# Altium PCB PCB2.PcbDoc
Units mm, origin at the board's own origin, x right, y up, seen from the top; angles counter-clockwise.
Board outline 101.75 x 39.87 mm, 2 copper layers (Top Layer, Bottom Layer); 16 components, 6 nets, 33 pads, 32 vias.
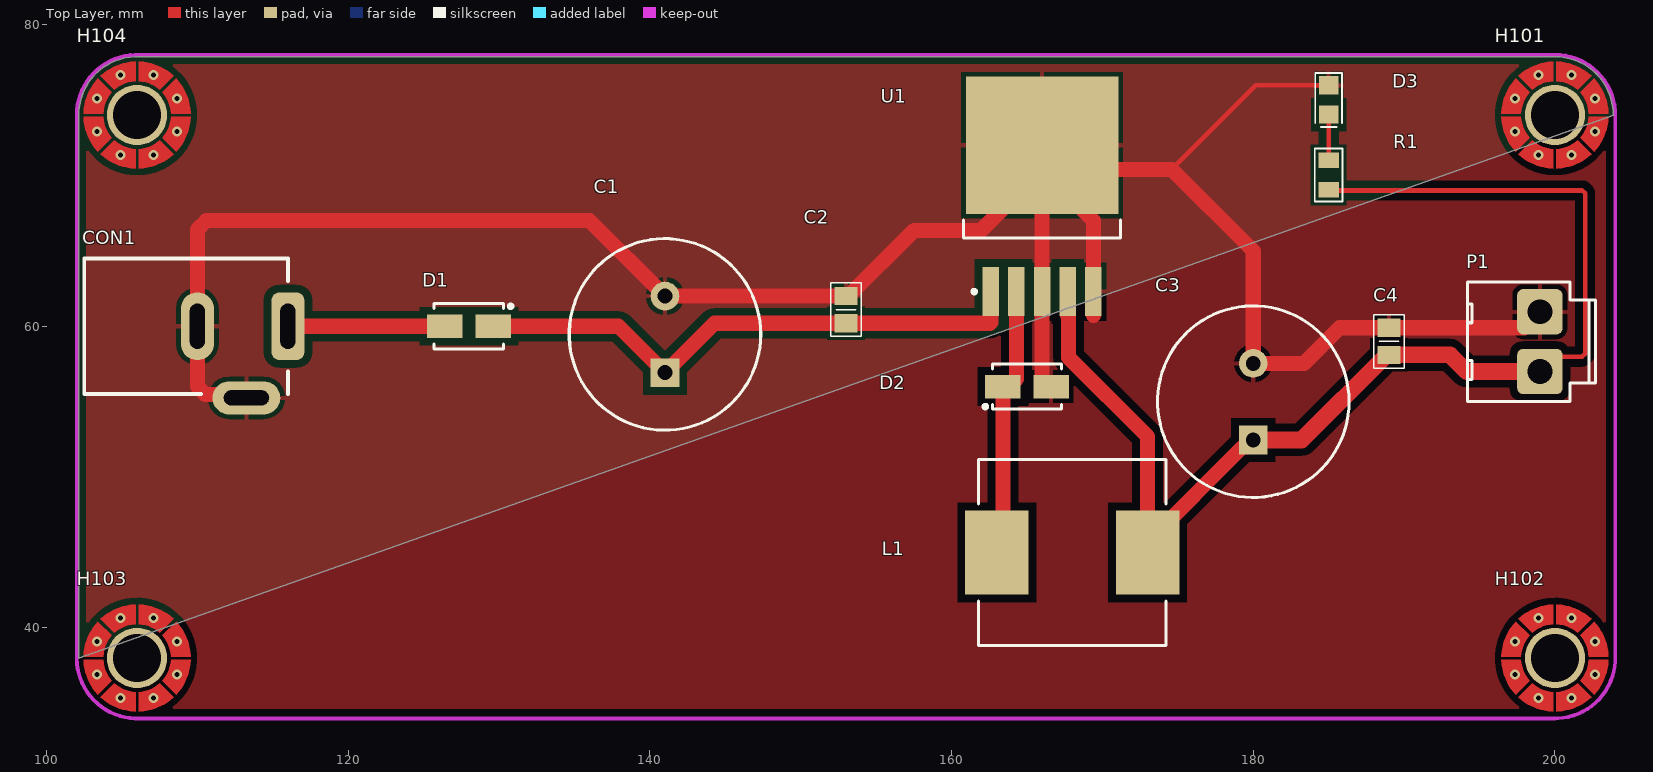
[diagram p0: Top Layer view]
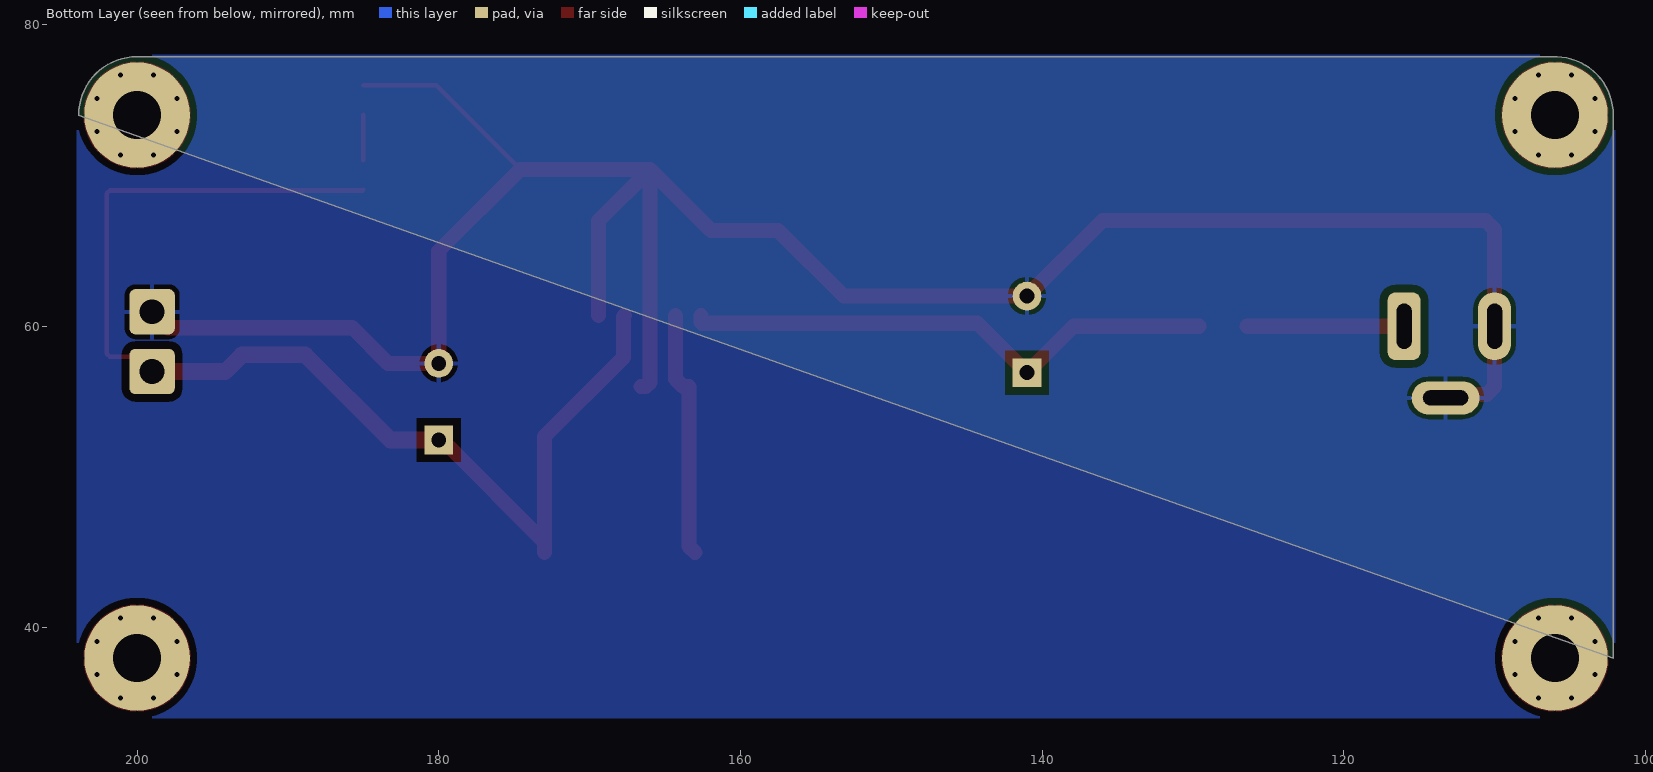
[diagram p1: Bottom Layer view, seen from below]

## Layer stack, top to bottom
Top Solder: solder mask 0.0102, Solder Resist, Dk 3.5
Top Layer: signal copper 0.0356
Dielectric 1: dielectric 0.32, FR-4, Dk 4.8
Bottom Layer: signal copper 0.0356
Bottom Solder: solder mask 0.0102, Solder Resist, Dk 3.5

## Board outline
102.127,38 102.127,74 cw(c106,74) 105.873,77.871 106,77.873 200,77.873 cw(c200,74) 203.873,74

## Design rules (kind name [scope] priority, off if disabled: settings)
Clearance Clearance_3 [InComponent('H*')] p1: gap=0 ignorepadtopadclearanceinfootprint=FALSE
Clearance Clearance_2 [InNet('ACL*') OR InNet('ACN*')] p2: gap=0.35 ignorepadtopadclearanceinfootprint=FALSE except(0: Arc-Hole Track-Hole SMDPad-Hole THPad-Hole Via-Hole Fill-Hole Poly-Hole Region-Hole Text-Hole)
Clearance Clearance_1 [InPolygon] p3: gap=0.5 ignorepadtopadclearanceinfootprint=FALSE except(0: Arc-Hole Track-Hole SMDPad-Hole THPad-Hole Via-Hole Fill-Hole Poly-Hole Region-Hole Text-Hole)
Clearance [All] p4: gap=0.3 ignorepadtopadclearanceinfootprint=FALSE except(0: Arc-Hole Track-Hole SMDPad-Hole THPad-Hole Via-Hole Fill-Hole Poly-Hole Region-Hole Text-Hole)
ComponentClearance ComponentClearance_1 [InComponent('M802') OR  InComponent('P104') OR InComponent('Y202') OR InComponent('C101') OR InComponent('P101') OR InComponent('L101') OR  InComponent('S309') OR InComponent('S310') OR InComponent('H*')] p1: gap=0 collisioncheckmode=3 verticalgap=0 showdistances=FALSE
ComponentClearance [All] p2: gap=0.254 collisioncheckmode=3 verticalgap=0.254 showdistances=FALSE
Height [All] p1: minheight=0 maxheight=30 prefheight=12.7
PolygonConnect PolygonConnect_1 [IsVia] p1: connectstyle=Direct reliefconductorwidth=0.254 reliefentries=4 polygonreliefangle="90 Angle" airgapwidth=0.254
PolygonConnect PolygonConnect_2 [InNet('GND')] p2: connectstyle=Relief reliefconductorwidth=0.3 reliefentries=4 polygonreliefangle="90 Angle" airgapwidth=0.3
PolygonConnect [All] p3: connectstyle=Relief reliefconductorwidth=0.381 reliefentries=4 polygonreliefangle="90 Angle" airgapwidth=0.635
RoutingVias [All] p1: holewidth=0.4 width=0.8 viastyle="Through Hole" minholewidth=0.3 minwidth=0.6 maxholewidth=2 maxwidth=5
SolderMaskExpansion [All] p1: expansion=0.102 istentingtop=FALSE
Width [All] p1: maxlimit=50 minlimit=0.2 preferedwidth=0.3
28 further rules are at their usual default settings.

## Components (designator, comment, footprint, x,y, rotation, side; value= is the part's Value field where it differs from the comment)
C1 "680uF" CYL/D.500/LS.200 141,59.46 r90 top
C2 "0.1uF" "C 0805" 153,61.1 r90 top
C3 "220uF" CYL/D.500/LS.200 180,55 r90 top
C4 "0.1uF" "C 0805" 189,59 r90 top
CON1 "CON DC PWR" CONN/DC/PWR/5.0MM 116,60 r0 top
D1 "SS34" "DO-214AC (SMA)" 128,60 r0 top
D2 "IN5824" "DO-214AC (SMA)" 165,56 r180 top
D3 "Led" "Led 0805 RED" 185,75 r90 top
H101 "Screw Hole" SCREW/3.2/7.0/M 200,74 r0 top
H102 "Screw Hole" SCREW/3.2/7.0/M 200,38 r0 top
H103 "Screw Hole" SCREW/3.2/7.0/M 106,38 r0 top
H104 "Screw Hole" SCREW/3.2/7.0/M 106,74 r0 top
L1 "33uH" "Inductor SMD 12x12x8" 168,45 r0 top
P1 "Header 2" HDR/Header/2/VH 199,58.98 r90 top
R1 "1k" "R 0805" 185,70.025 r270 top
U1 "LM2596S-5.0" TO-263-5 166,68.6 r90 top

## Footprints (in the part's own frame and the unit in brackets; to place one, negate y for a bottom-side part, rotate by r counter-clockwise, add the part's x,y. Pads: shape width x height; smd on the part's side, far side on the other; paste and mask are expansions set on the pad)
"C 0805" [mm] "Chip Capacitor, 2-Leads, Body 2.0x1.3mm, IPC Medium Density"
  rect 1.2x1.5 smd: 1(-0.9,0) 2(0.9,0)
  silkscreen extent -1.78,-1 1.78,1, body extent -1,-0.64 1,0.61, height 0.6
CONN/DC/PWR/5.0MM [mm]
  rrect50% 2.2x4.5 hole 1 slot 3 at 90 deg: 1(0,0)
  oval 2.2x4.5 hole 1 slot 3 at 90 deg: 2(-6,0)
  oval 4.5x2.2 hole 1 slot 3 at 0 deg: 3(-2.75,-4.75)
  silkscreen extent -13.5,-4.5 0,4.5, body extent -13.58,-5 0.25,4.5, height 11.02
CYL/D.500/LS.200 [mil]
  rect 75x75 hole 39: 1(-100,0)
  round 75 hole 39: 2(100,0)
  silkscreen extent -250,-250 250,250, body extent -256,-255 254,255, height 866
"DO-214AC (SMA)" [mm] "Molded Diode, 2-Leads, Body 4.3x2.7mm, IPC Medium Density"
  rect 2.35x1.55 smd: 1(-1.6,0) 2(1.6,0)
  silkscreen extent -2.3,-1.5 2.89,1.5, body extent -2.6,-1.3 2.6,1.3, height 2.4
HDR/Header/2/VH [mm]
  rrect25% 3x3 hole 1.65: 1(-1.98,0) 2(1.98,0)
  silkscreen extent -3.96,-3.7 3.96,4.8, body extent -3.93,-3.7 3.93,4.8, height 10.6
"Inductor SMD 12x12x8" [mm] "Precision Wire Wound Inductor, 2-Leads, Body 12.3x12.3mm, IPC Low Density"
  rect 4.2x5.6 smd: 1(-5,0) 2(5,0)
  silkscreen extent -6.2,-6.15 6.2,6.15, body extent -6.25,-6.25 6.25,6.25, height 8.01
"Led 0805 RED" [mm] "Led SMD 0805"
  rect 1.2x1.3 smd: 1(-0.975,0) 2(0.975,0)
  silkscreen extent -1.78,-0.89 1.78,0.89, body extent -1.01,-0.63 1.01,0.62, height 1.1
"R 0805" [mm] "Chip Resistor, 2-Leads, Body 2.0x1.3mm, IPC Medium Density"
  rect 1.05x1.35 smd: 1(-0.975,0) 2(0.975,0)
  silkscreen extent -1.75,-0.92 1.75,0.92, body extent -1,-0.61 1,0.59, height 0.5
SCREW/3.2/7.0/M [mm]
  round 4 / inner round 7 / far side round 7 hole 3.2: 1(0,0)
  Top Layer region: -2.25,0.1 -2.225,0.325 -2.175,0.575 -2.1,0.8 -2.025,0.975 -1.95,1.125 -1.875,1.25 -1.775,1.375 -1.675,1.5 -2.6,2.425 -2.775,2.225 -2.925,2.025 -3.05,1.825 -3.175,1.6 -3.275,1.375 -3.35,1.175 -3.425,0.95 -3.475,0.725 -3.5,0.6 -3.525,0.45 -3.55,0.1
  Top Layer region: -2.25,-0.1 -2.225,-0.325 -2.175,-0.575 -2.1,-0.8 -2.025,-0.975 -1.95,-1.125 -1.875,-1.25 -1.775,-1.375 -1.675,-1.5 -2.6,-2.425 -2.775,-2.225 -2.925,-2.025 -3.05,-1.825 -3.175,-1.6 -3.275,-1.375 -3.35,-1.175 -3.425,-0.95 -3.475,-0.725 -3.5,-0.6 -3.525,-0.45 -3.55,-0.1
  Top Layer region: -0.1,2.25 -0.325,2.225 -0.575,2.175 -0.8,2.1 -0.975,2.025 -1.125,1.95 -1.25,1.875 -1.375,1.775 -1.5,1.675 -2.425,2.6 -2.225,2.775 -2.025,2.925 -1.825,3.05 -1.6,3.175 -1.375,3.275 -1.175,3.35 -0.95,3.425 -0.725,3.475 -0.6,3.5 -0.45,3.525 -0.1,3.55
  Top Layer region: 0.1,2.25 0.325,2.225 0.575,2.175 0.8,2.1 0.975,2.025 1.125,1.95 1.25,1.875 1.375,1.775 1.5,1.675 2.425,2.6 2.225,2.775 2.025,2.925 1.825,3.05 1.6,3.175 1.375,3.275 1.175,3.35 0.95,3.425 0.725,3.475 0.6,3.5 0.45,3.525 0.1,3.55
  Top Layer region: 2.25,-0.1 2.225,-0.325 2.175,-0.575 2.1,-0.8 2.025,-0.975 1.95,-1.125 1.875,-1.25 1.775,-1.375 1.675,-1.5 2.6,-2.425 2.775,-2.225 2.925,-2.025 3.05,-1.825 3.175,-1.6 3.275,-1.375 3.35,-1.175 3.425,-0.95 3.475,-0.725 3.5,-0.6 3.525,-0.45 3.55,-0.1
  Top Layer region: 2.25,0.1 2.225,0.325 2.175,0.575 2.1,0.8 2.025,0.975 1.95,1.125 1.875,1.25 1.775,1.375 1.675,1.5 2.6,2.425 2.775,2.225 2.925,2.025 3.05,1.825 3.175,1.6 3.275,1.375 3.35,1.175 3.425,0.95 3.475,0.725 3.5,0.6 3.525,0.45 3.55,0.1
  Top Layer region: 0.1,-2.25 0.325,-2.225 0.575,-2.175 0.8,-2.1 0.975,-2.025 1.125,-1.95 1.25,-1.875 1.375,-1.775 1.5,-1.675 2.425,-2.6 2.225,-2.775 2.025,-2.925 1.825,-3.05 1.6,-3.175 1.375,-3.275 1.175,-3.35 0.95,-3.425 0.725,-3.475 0.6,-3.5 0.45,-3.525 0.1,-3.55
  Top Layer region: -0.1,-2.25 -0.325,-2.225 -0.575,-2.175 -0.8,-2.1 -0.975,-2.025 -1.125,-1.95 -1.25,-1.875 -1.375,-1.775 -1.5,-1.675 -2.425,-2.6 -2.225,-2.775 -2.025,-2.925 -1.825,-3.05 -1.6,-3.175 -1.375,-3.275 -1.175,-3.35 -0.95,-3.425 -0.725,-3.475 -0.6,-3.5 -0.45,-3.525 -0.1,-3.55
  Top Layer pour cut-out: -4,0 -3.696,1.531 -2.828,2.828 -1.531,3.695 0,4 0,4 1.531,3.695 2.828,2.828 3.695,1.531 4,0 4,0 3.696,-1.531 2.828,-2.828 1.531,-3.696 0,-4 0,-4 -1.531,-3.696 -2.828,-2.828 -3.696,-1.531 -4,0
  Bottom Layer pour cut-out: -4,0 -3.696,1.531 -2.828,2.828 -1.531,3.695 0,4 0,4 1.531,3.695 2.828,2.828 3.695,1.531 4,0 4,0 3.696,-1.531 2.828,-2.828 1.531,-3.696 0,-4 0,-4 -1.531,-3.696 -2.828,-2.828 -3.696,-1.531 -4,0
TO-263-5 [mm] "D2-PAK, 6-Pads, Body 8.9x10.4mm (max), IPC Medium Density"
  rect 3.25x1.1 smd: 1(-6.3,3.4) 2(-6.3,1.7) 3(-6.3,0) 4(-6.3,-1.7) 5(-6.3,-3.4)
  rect 9.1x10.1 smd: 6(3.4,0)
  silkscreen extent -6.42,-5.2 -1.55,5.2, body extent -7.56,-4.98 8.11,5.02, height 4.83

## Part data
C1 C3: library part Capacitor, "Capacitor pol"
C2 C4: library part "Capacitor NP", "Capacitor non-pol"
CON1: "DC input connector"
D1: library part Diode, "Default Diode"
D2: library part "Diode Schottky", "Schottky Diode"
D3: "Typical LED"
L1: library part Inductor, "Inductor"
P1: "Header, 2-Pin"
R1: library part Resistor, "Resistor"
U1: "Simple Switcher 3A Step-Down Voltage Regulator"
H101 H102 H103 H104: TYPE=NO-BOM, UNIT PRICE=0

## Via types
v1: diameter 0.66, hole 0.33, Top Layer to Bottom Layer, 32 vias

## Nets (pads, with @x,y where several pads share a name; then routed paths per layer and width w, separated by ;. In a path a pad name is that pad's centre, name@x,y a point inside that pad or via, vN(x,y) a via of type N, cw(c..) or ccw(c..) an arc to the next point about the centre after c; other vN are vias at no path point)
5V: C3.1 C4.1 L1.2 P1.1 R1.2 U1.4 | length 80.7
  Top Layer w0.3: R1.2 185.05,69 201.824,69 202,68.824 202,58.176 201.799,57.975 199.975,57.975 P1.1
  Top Layer w1: U1.4@167.7,60.7 167.75,60.65 167.75,57.931 173,52.681 L1.2@173,45.7 ; L1.2 L1.2@173,45.7 ; C3.1 179.548,52.008 179.308,52.008 L1.2@173,45.7
  Top Layer w1.1: C3.1 183.21,52.46 188.85,58.1 C4.1 193.05,58.1 194.15,57 P1.1
GND: C1.2 C2.2 C3.2 C4.2 CON1.2 CON1.3 D2.1 D3.2 P1.2 U1.3 U1.5 U1.6 | length 158.5
  Top Layer w0.3: 174.6,70.4 180.175,75.975 D3.2
  Top Layer w1: CON1.3 113.02,55.48 110.52,55.48 110,56 CON1.2 110,66.414 110.586,67 136,67 C1.2 C2.2 153.15,62 157.5,66.35 161.95,66.35 U1.6@166,70.4 ; D2.1 166.275,56 166,56.275 166,60.7 U1.6@166,70.4 ; U1.5@169.4,60.7 169.4,67 U1.6@166,70.4 ; P1.2 197.94,59.9 C4.2 185.727,59.9 183.367,57.54 C3.2 180,65 174.6,70.4 U1.6@166,70.4
NetC1_1: C1.1 C2.1 D1.2 U1.1 | length 36.1
  Top Layer w1: D1.2 137.92,60 C1.1 144.28,60.2 C2.1 162.55,60.2 162.6,60.25 U1.1@162.6,60.7
NetCON1_1: CON1.1 D1.1 | length 10.4
  Top Layer w1: CON1.1 D1.1
NetD2_2: D2.2 L1.1 U1.2 | length 16.5
  Top Layer w1: L1.1 163.4,45.4 D2.2 163.8,56 164.3,56.5 U1.2@164.3,60.7
NetD3_1: D3.1 R1.1 | length 3
  Top Layer w0.3: R1.1 D3.1
pads on no net: H101.1 H102.1 H103.1 H104.1
copper on no net:
  other v1: 104.9,35.35 107.1,35.35 198.9,35.35 201.1,35.35 103.35,36.9 108.65,36.9 197.35,36.9 202.65,36.9 103.35,39.1 108.65,39.1 197.35,39.1 202.65,39.1 104.9,40.65 107.1,40.65 198.9,40.65 201.1,40.65 104.9,71.35 107.1,71.35 198.9,71.35 201.1,71.35 103.35,72.9 108.65,72.9 197.35,72.9 202.65,72.9 103.35,75.1 108.65,75.1 197.35,75.1 202.65,75.1 104.9,76.65 107.1,76.65 198.9,76.65 201.1,76.65

## Polygon pours and split planes (outlines as drawn)
GND on Bottom Layer "GND_L02_P001" (solid, remove dead copper, pour order 1): 102,78 204,78 204,34 102,34
GND on Top Layer "GND_L01_P000" (solid, remove dead copper, pour order 0): 102,78 204,78 204,34 102,34

## Keep-outs
Top Layer:
  lines w0.254: 105.869,34.002 cw(c106,38) 102,38 102,74 cw(c106,74) 105.869,77.998 ; 106,34 200,34 ; 106,78 200,78 cw(c200,74) 204,74 204,38 ; 199.869,34.002 ccw(c200,38) 203.998,38.131